# Altium PCB sensor.PcbDoc
Units mil, origin at the board's own origin, x right, y up, seen from the top; angles counter-clockwise.
Board outline 802.43 x 2180.38 mil, 2 copper layers (Top Layer, Bottom Layer); 7 components, 6 nets, 26 pads, 39 vias.
Unrouted connection lines stored in the file: 1.
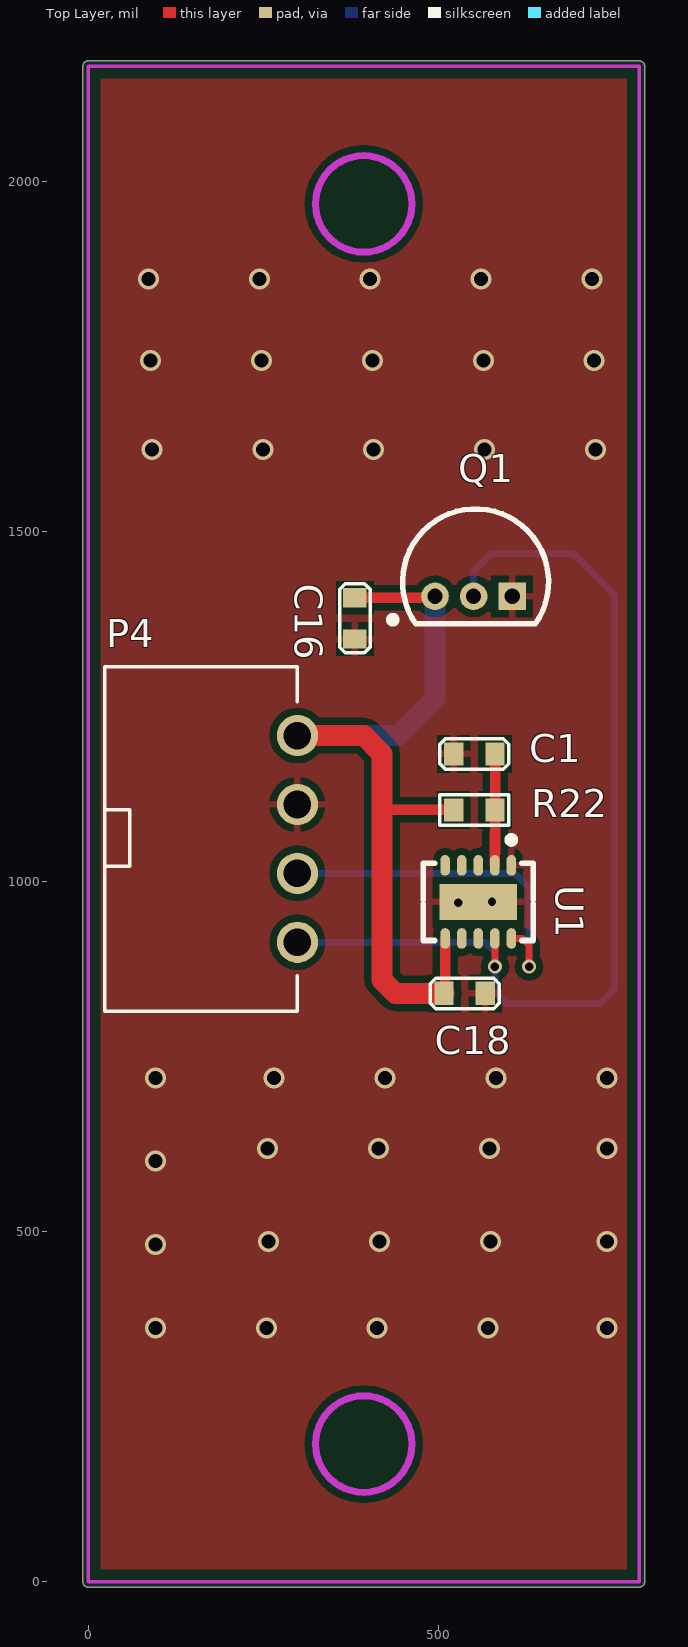
[diagram p0: Top Layer view]
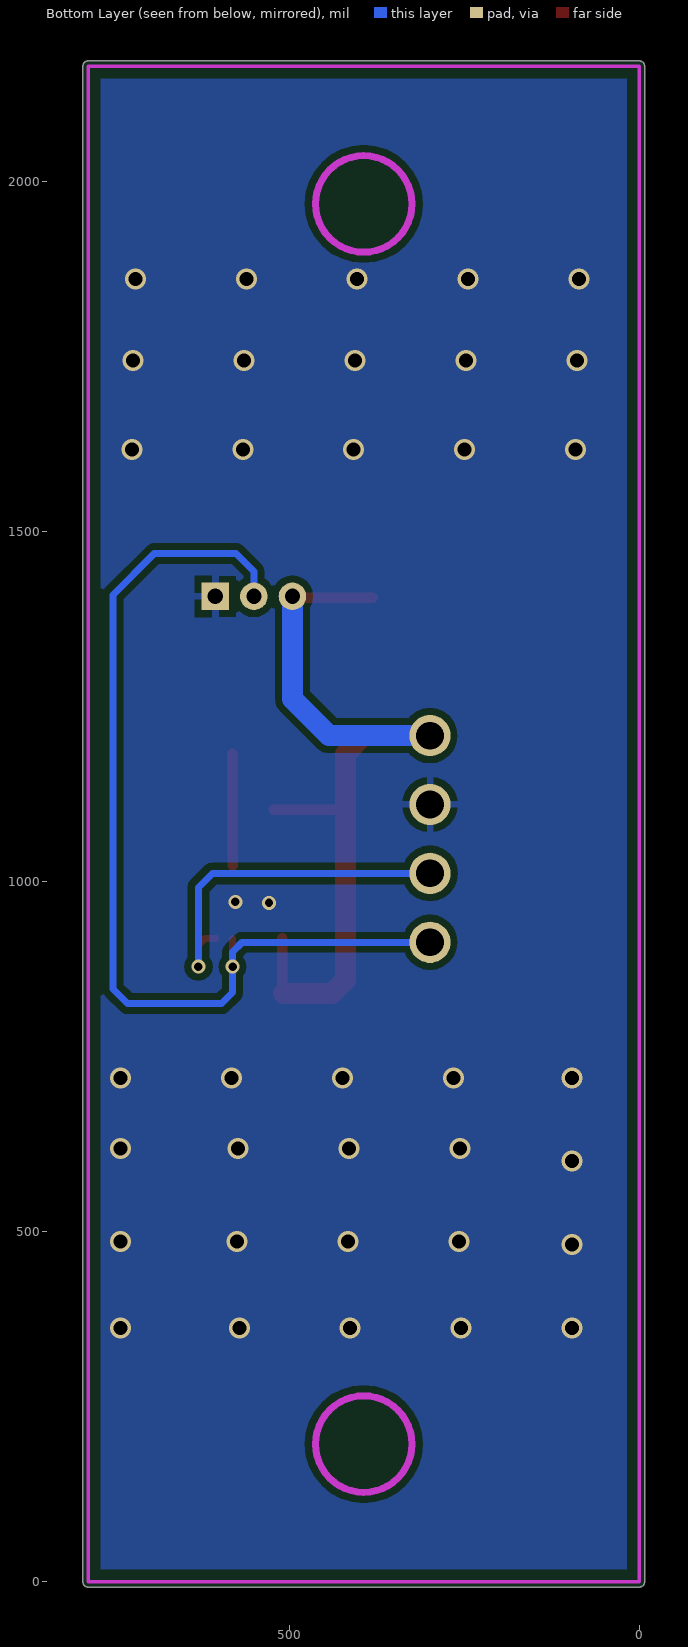
[diagram p1: Bottom Layer view, seen from below]

## Layer stack, top to bottom
Top Layer: signal copper 1.4
Dielectric: dielectric 12.6, FR-4, Dk 4.8
Bottom Layer: signal copper 1.4

## Board outline
0,-7.51 cw(c0,0) -7.52,0 -7.52,2165.35 cw(c0,2165.35) 0,2172.87 787.4,2172.87 cw(c787.4,2165.35) 794.92,2165.35 794.92,0 cw(c787.4,0) 787.4,-7.51

## Design rules (kind name [scope] priority, off if disabled: settings)
Clearance [All] p1: gap=10
PolygonConnect [All] p1: connectstyle=Relief reliefconductorwidth=10 reliefentries=4 polygonreliefangle="90 Angle"
RoutingVias [All] p1: holewidth=28 width=50 viastyle="Through Hole" minholewidth=28 minwidth=50 maxholewidth=28 maxwidth=50
SilkscreenOverComponentPads [All] p1: minsilkscreentomaskgap=10
SolderMaskExpansion [All] p1: expansion=4
Width [All] p1: maxlimit=200 minlimit=10 preferedwidth=10
27 further rules are at their usual default settings.

## Components (designator, comment, footprint, x,y, rotation, side; value= is the part's Value field where it differs from the comment)
C1 "0.1uF/16V" 0603C 581.32,1182.7 r180 top
C16 "0.1uF/16V" 0603C 381,1406 r270 top
C18 "10uF/16V" 0603C 508.32,840.65 r0 top
P4 "Header 4" 4-2.5MM-W 299,1209 r270 top
Q1 "Header 3" TO-92 550.65,1408 r180 top
R22 "10K" 0603R 581.32,1102.7 r180 top
U1 "CCS811" QFN60P270X400X80-10N 557.32,971.35 r270 top

## Footprints (in the part's own frame and the unit in brackets; to place one, negate y for a bottom-side part, rotate by r counter-clockwise, add the part's x,y. Pads: shape width x height; smd on the part's side, far side on the other; paste and mask are expansions set on the pad)
4-2.5MM-W [mm]
  round 1.5 hole 1: 1(0,0) 2(2.5,0) 3(5,0) 4(7.5,0)
  silkscreen extent -2.5,-7 10,0
0603C [mm]
  rect 0.7x0.85 smd: 1(0,0) 2(1.5,0)
  silkscreen extent -0.5,-0.55 2,0.55
0603R [mm]
  rect 0.7x0.85 smd: 1(0,0) 2(1.5,0)
  silkscreen extent -0.5,-0.55 2,0.55
QFN60P270X400X80-10N [mm] "QFN, 10-Leads, Body 4.0x2.7mm (max), Pitch 0.60mm, IPC Medium Density"
  oval 0.75x0.35 smd: 1(-1.325,1.2) 2(-1.325,0.6) 3(-1.325,0) 4(-1.325,-0.6) 5(-1.325,-1.2) 6(1.325,-1.2) 7(1.325,-0.6) 8(1.325,0) 9(1.325,0.6) 10(1.325,1.2)
  rect 1.3x2.8 smd: 11(0,0)
  silkscreen extent -2.37,-2 1.4,2, body extent -1.35,-2 1.35,2, height 0.8
TO-92 [mm]
  rect 1x1 hole 0.55: 1(-1.4,0)
  round 1 hole 0.55: 2(0,0) 3(1.4,0)
  silkscreen extent -2.72,-3.17 3.06,1

## Part data
C1 C16 C18: library part Cap, "Capacitor"
P4: "Header, 4-Pin"
Q1: "Header, 3-Pin"
R22: library part Res1, "Resistor"

## Via types
v1: diameter 30, hole 20, Top Layer to Bottom Layer, tented both sides, 35 vias
v2: diameter 20, hole 12, Top Layer to Bottom Layer, tented both sides, 4 vias

## Nets (pads, with @x,y where several pads share a name; then routed paths per layer and width w, separated by ;. In a path a pad name is that pad's centre, name@x,y a point inside that pad or via, vN(x,y) a via of type N, cw(c..) or ccw(c..) an arc to the next point about the centre after c; other vN are vias at no path point)
GND: C1.2 C16.2 C18.2 P4.2 Q1.1 U1.1 U1.11
  other v1: 96,363 254.5,363 413,363 571.5,363 741,363 96,482 257.5,486 416,486 574.5,486 741,486 96,601 256.5,619 415,619 573.5,619 741,619 96,720 265.5,720 424,720 582.5,720 741,720 91,1618 249.5,1618 408,1618 566.5,1618 725,1618 89,1745 247.5,1745 406,1745 564.5,1745 723,1745 86,1861 244.5,1861 403,1861 561.5,1861 720,1861
  other v2: 529,970 577,971.35
NetC1_1: C1.1 R22.1 U1.2 | length 186.7
  Top Layer w15: U1.2 580.94,1069.62 581.32,1070 ; 581.32,1042.64 581.32,1070 ; C1.1 R22.1 581.32,1070
NetU1_4: U1.4 U1.5
SENSOR_SCK: P4.3 U1.10 | length 512.6
  Top Layer w10: U1.10 620.81,919.19 630,910 v2(630,879)
  Bottom Layer w10: P4.3 609.85,1012.15 630,992 v2(630,879)
SENSOR_SDA: P4.4 Q1.2 U1.9 | length 1407.2
  Top Layer w10: U1.9 580.94,879.06 v2(581,879)
  Bottom Layer w10: P4.4 567.28,913.72 581,900 v2(581,879) 581,842 597,826 731,826 752,847 752,1410 693,1469 576,1469 550.65,1443.65 Q1.2
VCC_3.3V: C16.1 C18.1 P4.1 Q1.3 R22.2 U1.6 | length 1214.1
  Top Layer w15: C16.1 493.53,1406 Q1.3 ; 420,1106 423.3,1102.7 R22.2 ; C18.1 510.07,842.41 U1.6
  Top Layer w30: P4.1 394,1209 420,1183 420,1106 420,860 439.35,840.65 C18.1
  Bottom Layer w30: P4.1 443,1209 495.53,1261.53 Q1.3
pads on no net: U1.3 U1.7 U1.8

## Polygon pours and split planes (outlines as drawn)
GND on Top Layer "Mid-Layer 1-No Net" (solid, remove dead copper): -44.47,2153.52 -13.47,2208 802.53,2208 802.53,-27.55 786.53,-55.67 775.53,-75 -46.47,-75 -46.47,83.18 -132.47,234.32 -33.47,408.31 -33.47,2202.73
GND on Bottom Layer "Mid-Layer 1-No Net" (solid, remove dead copper): -65.84,2183.36 -59.84,2193.53 831.16,2193.53 831.16,-16.63 806.16,-59 770.16,2.02 -29.84,2.02 -29.84,2146.07 -62.84,2202

## Keep-outs
Keep-Out Layer:
  circle w10: c393.7,1968.5 r68.9
  circle w10: c393.7,196.85 r68.9
  lines w5: 0,0 0,2165.35 787.4,2165.35 787.4,0 0,0

## Silkscreen, mask and mechanical layers (free items; w line width, h text height)
Mechanical 1:
  circle w10: c393.7,196.85 r68.9
  circle w10: c393.7,1968.5 r68.9
  lines w5: 0,0 787.4,0 787.4,2165.35 0,2165.35 0,0